# Altium PCB REINDEER_01.PcbDoc
Units mm, origin at the board's own origin, x right, y up, seen from the top; angles counter-clockwise.
Board outline 131.83 x 78.27 mm, 2 copper layers (Top Layer, Bottom Layer), stack 0.971 mm thick; 7 components, 4 nets, 64 pads, 4 vias.
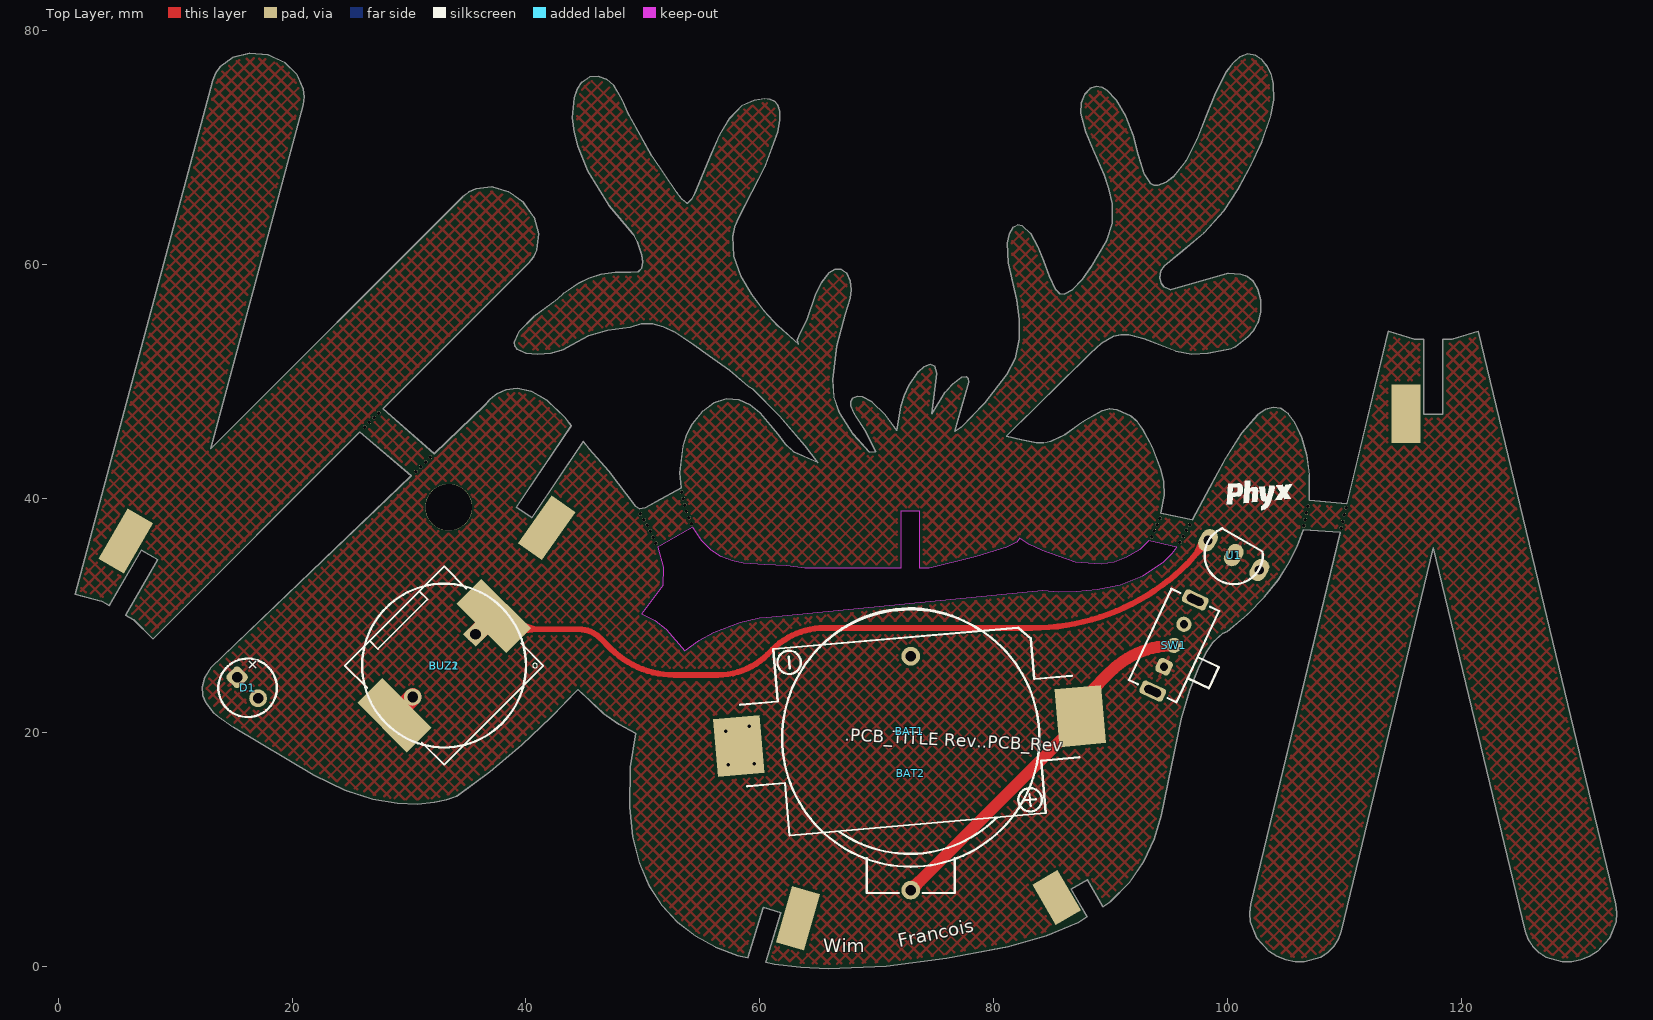
[diagram p0: Top Layer view]
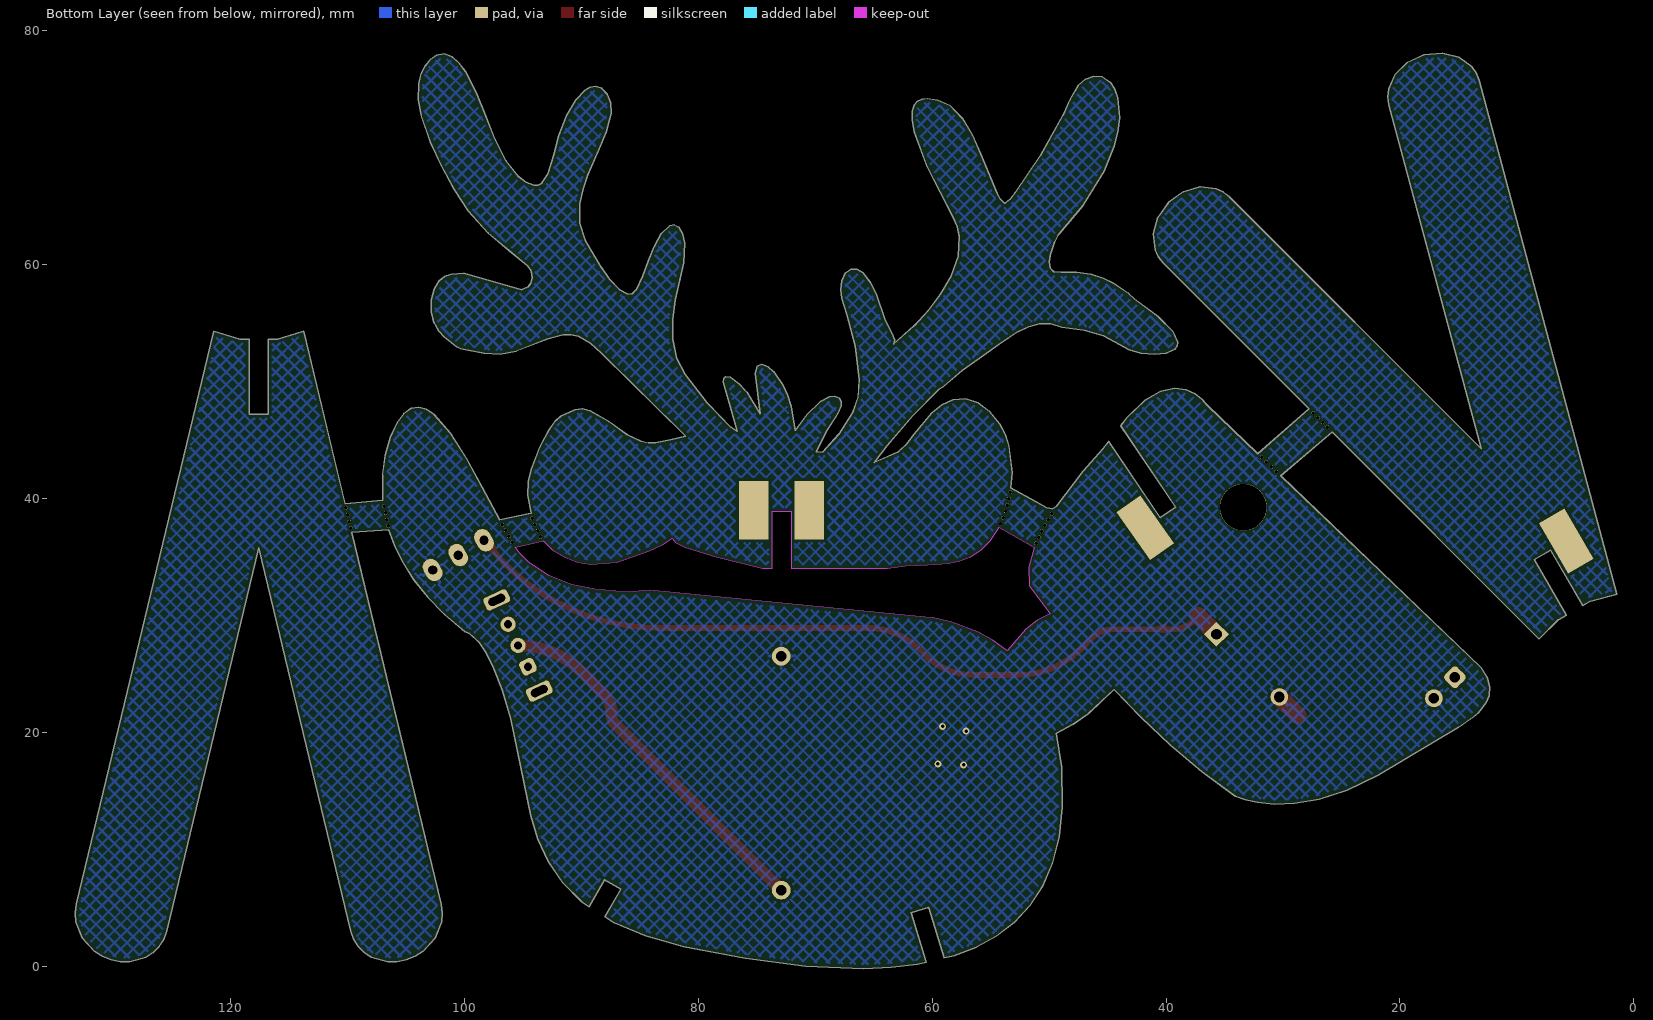
[diagram p1: Bottom Layer view, seen from below]
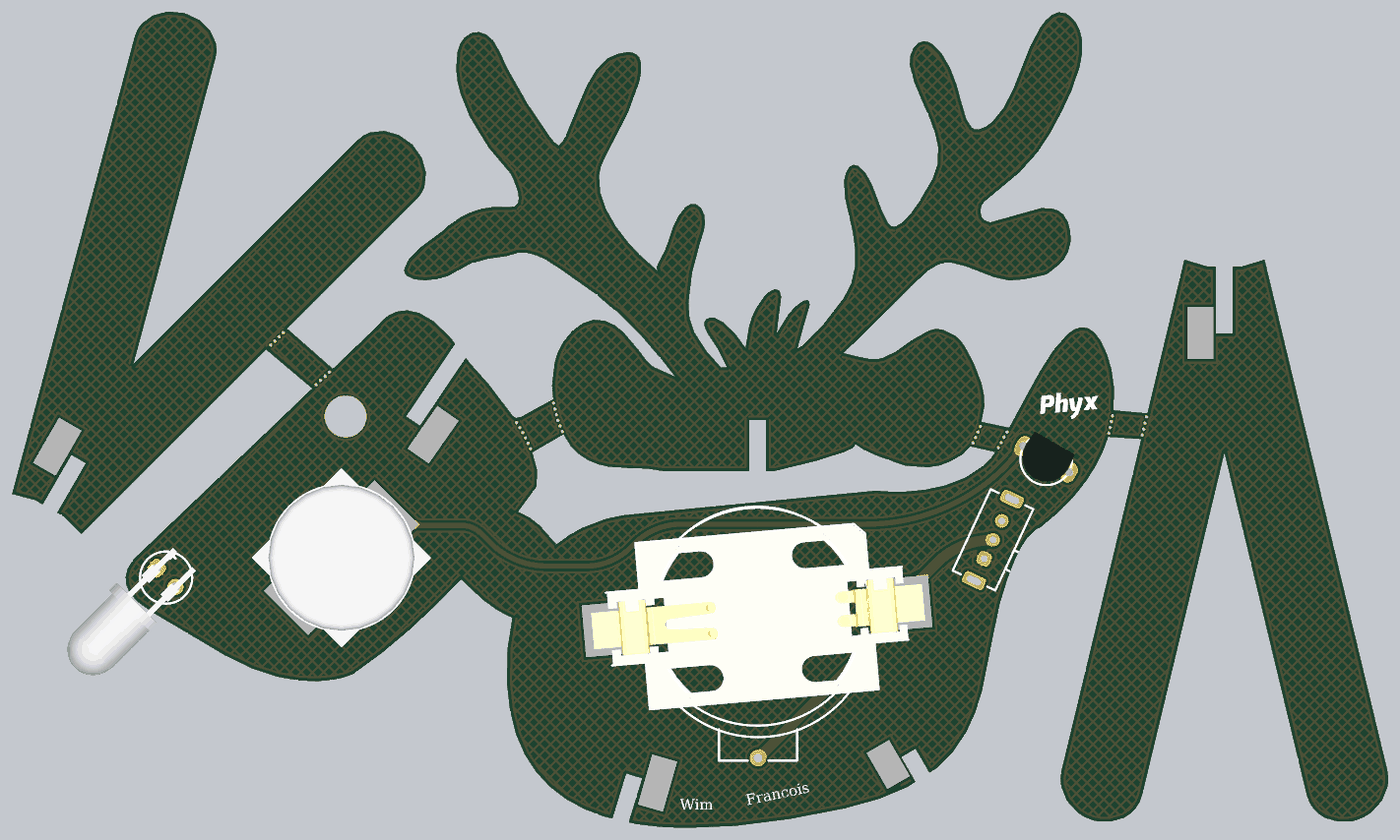
[diagram p2: 3D render of the assembled board from above, using the file's embedded part models]

## Layer stack, top to bottom
Top Solder: solder mask 0.0102, Solder Resist, Dk 3.5
Top Layer: signal copper 0.0356
Dielectric1: core 0.9, FR-4, Dk 4.8
Bottom Layer: signal copper 0.0356
Bottom Solder: solder mask 0.0102, Solder Resist, Dk 3.5

## Board outline
438 vertices, not listed, extent 1.45,-0.205 133.277,78.068
cut-out: 51.001,29.554 51.981,28.79 53.574,26.966 54.815,27.871 56.051,28.563 58.312,29.423 59.961,29.772 60.598,29.838 84.177,32.129 85.568,32.032 87.061,32.043 88.866,32.212 90.818,32.628 92.754,33.377 94.508,34.55 95.266,35.323 95.634,35.838 93.229,36.383 92.467,35.597 91.366,34.969 90.291,34.55 89.192,34.38 86.981,34.532 84.2,35.527 82.97,36.092 82.238,36.58 81.971,36.231 81.121,35.828 78.437,34.984 74.463,34.012 73.663,34.012 73.663,38.889 72.063,38.889 72.063,34.012 63.847,34.012 62.287,34.248 60.435,34.306 58.585,34.43 57.643,34.648 56.716,35.014 55.83,35.568 55.011,36.353 54.265,37.536 51.274,35.804 51.731,34.101 51.692,32.544 49.907,30.117

## Design rules (kind name [scope] priority, off if disabled: settings)
BoardOutlineClearance [NOT OnLayer('Top Overlay') AND NOT OnLayer('Bottom Overlay') AND NOT IsText AND NOT HasFootprint('MicroBIT_PCB') AND NOT IsKeepOut] p1: gap=0.5 ignorepadtopadclearanceinfootprint=FALSE except(0: Arc-SplitContinuation Track-SplitContinuation SMDPad-SplitContinuation THPad-SplitContinuation Via-SplitContinuation Fill-SplitContinuation Poly-SplitContinuation Region-SplitContinuation Text-SplitContinuation; 0.15: SMDPad-OutlineEdge THPad-OutlineEdge; 0.25: Poly-OutlineEdge Poly-CutoutEdge Region-OutlineEdge; 0.3: Arc-OutlineEdge Track-OutlineEdge; 0.4: Via-OutlineEdge)
Clearance [All] p1: gap=0.15 ignorepadtopadclearanceinfootprint=FALSE except(0.25: Arc-Poly Track-Poly SMDPad-Poly THPad-Poly Via-Poly Fill-Poly; 0.5: Poly-Poly)
ComponentClearance ComponentClearance_TP [HasFootprint('TP_2x3mm')] p1: gap=0 collisioncheckmode=3 verticalgap=0 showdistances=FALSE
ComponentClearance [All] p2: gap=0.25 collisioncheckmode=3 verticalgap=0.25 showdistances=FALSE
DiffPairsRouting [All] p1: maxlimit=0.254 minlimit=0.2 mostfreqgap=0.2 toplayer_minwidth=0.25 toplayer_maxwidth=0.5 toplayer_prefwidth=0.25 bottomlayer_minwidth=0.25 bottomlayer_maxwidth=0.5 bottomlayer_prefwidth=0.25 maxuncoupledlength=12.7
HoleSize [All] p1: absolutevalues=TRUE maxlimit=10 minlimit=0.025 maxpercent=80.000 minpercent=20.000
PolygonConnect PolygonConnect_VIA [IsVia] p1: connectstyle=Direct reliefconductorwidth=0.254 reliefentries=4 polygonreliefangle="90 Angle" airgapwidth=0.254
PolygonConnect [All] p2: connectstyle=Relief reliefconductorwidth=0.254 reliefentries=4 polygonreliefangle="90 Angle" airgapwidth=0.254
RoutingVias [All] p1: holewidth=0.3 width=0.7 viastyle="Through Hole" minholewidth=0.3 minwidth=0.2 maxholewidth=0.6 maxwidth=1.2
SilkToSolderMaskClearance SilkscreenOverComponentPads [IsPad] p1: minsilkscreentomaskgap=0.254 clearancetoexposedcopper=TRUE
SolderMaskExpansion [All] p1: expansion=0.05 istentingtop=FALSE
SupplyNets "Schematic Supply Nets_2" [InNet('VCC')] p1: voltage=0.000
SupplyNets "Schematic Supply Nets_1" [InNet('GND')] p2: voltage=0.000
SupplyNets "Schematic Supply Nets" [InNet('VBAT')] p3: voltage=0.000
Width [All] p1: maxlimit=5 minlimit=0.15 preferedwidth=0.25
26 further rules are at their usual default settings.

## Components (designator, comment, footprint, x,y, rotation, side; value= is the part's Value field where it differs from the comment)
BAT1 "CR2032 SMD Battery Holder" BAT_CR2032_KEY_1060 72.8,20.1 r5 top value=CR2032
BAT2 "CR2032 Battery Holder" BAT_CR2032_China 72.9,13.5 r270 top value=CR2032
BUZ1 "12x12x3mm Piezo Buzzer Transducer 81dB" CUI_CMT-1203-SMT 33,25.7 r225 top value=CMT-1203-SMT
BUZ2 "14x14x7mm Piezo Buzzer Transducer 80dB" CUI_CEP-1162 33,25.7 r225 top value=CMT-1203-SMT
D1 "5mm IR LED, 940nm, 100mA, 1.35V, 25Deg" LED_5MM_RD 16.2,23.8 r315 top value=TSAL6400
SW1 "mini Switch 1 pole double throw right angle" SK-12D07 95.405,27.418 r65 top value=SK-12D07
U1 "UM66T - Fur Elise" TO-92A_WIDE 100.508,35.146 r60 top value=UM66T-19L

## Footprints (in the part's own frame and the unit in brackets; to place one, negate y for a bottom-side part, rotate by r counter-clockwise, add the part's x,y. Pads: shape width x height; smd on the part's side, far side on the other; paste and mask are expansions set on the pad)
BAT_CR2032_China [mm]
  round 1.6 hole 0.9: 1(7,0) 2(-13,0)
  silkscreen extent -17,-11 7.25,11, body extent -17.5,-11.5 7.25,11.5, height 9.2
BAT_CR2032_KEY_1060 [mm]
  rect 4x5 smd: 1(14.655,0) 2(-14.655,0)
  silkscreen extent -14.25,-10.5 14.25,10.5, body extent -15.81,-8.06 16.02,7.94, height 5.7
CUI_CEP-1162 [mm] "14x14x7mm piezo buzzer 7.6mm pitch"
  rect 1.5x1.5 hole 0.9: 1(-3.8,0)
  round 1.5 hole 0.9: 2(3.8,0)
  silkscreen extent -7,-7 7,7, body extent -7,-6.99 7,6.99, height 7.1
CUI_CMT-1203-SMT [mm] "12x12x3mm piezo buzzer"
  rect 3x6 smd: 1(-6,0) 2(6,0)
  silkscreen extent -6,-6 6,6, body extent -6,-6 6,6, height 3.05
LED_5MM_RD [mil] "5mm LED RED"
  rrect50% 60x60 hole 35.43: 1(-50,0)
  round 60 hole 35.43: 2(50,0)
  silkscreen extent -98,-98 98,98, body extent -117,-485 96,98, height 118
SK-12D07 [mm] "SWITCH, SPDT, THT, RA"
  rrect50% 1.2x2.2 hole 0.7 slot 1.5 at 90 deg: 0(-4.3,0) 0(4.3,0)
  rrect50% 1.3x1.3 hole 0.7: 1(-2,0)
  round 1.3 hole 0.7: 2(0,0) 3(2,0)
  silkscreen extent -4.3,-4.25 4.3,2.25, body extent -4.3,-4.25 4.3,2.25, height 4.7
TO-92A_WIDE [mm] "TO, Flat Index; 3 In-Line, Axial Leads; Body Dia. 4.5mm; Leads 0.51 x 0.48 mm (max)"
  oval 2x1.4 hole 0.8: 1(0,-2.54) 2(0,0) 3(0,2.54)
  silkscreen extent -2.48,-2.48 1.5,2.48, body extent -2.17,-2.74 1.77,2.86, height 10.2

## Part data
BAT1: library part "BAT # 20mm Coin Cell Holder Keystone 1060", "=Description", Supplier Part Number 1=36-1060-ND, Supplier 1=Digi-key, Supplier 2=LCSC, Supplier Part Number 2=C70377
BAT2: library part "BAT 20mm Coin Cell Holder Generic", "=Description", Supplier Part Number 1=C5239862, Supplier 1=LCSC, Supplier 2=LCSC, Supplier Part Number 2=C70376
BUZ1: library part "BUZ # CUI CMT-1203-SMT", "Crystal Oscillator", Supplier Part Number 1=102-2197-1-ND, Supplier 1=Digi-key, Supplier 2=LCSC, Supplier 3=LCSC, Supplier Part Number 2=C409829, Supplier Part Number 3=C391037
BUZ2: library part "BUZ CUI CEP-1162", "Crystal Oscillator", Supplier Part Number 1=102-1134-ND, Supplier 1=Digi-key, Supplier 2=LCSC, Supplier Part Number 2=C360604
D1: library part "LED IR 5mm TSAL6400", "=Description", Supplier Part Number 1=3152868, Supplier 1=Farnell
SW1: library part "SW 1P2T micro RA SK-12D07", Supplier Part Number 1=C22383479, Supplier 1=LCSC, Supplier 2=LCSC, Supplier Part Number 2=C521448
U1: library part "SOUND UM66T-19L", "=Description", Supplier Part Number 1=C136140, Supplier 1=LCSC

## Free pads (board coordinates)
  rect 2.5x5 smd rot 150: 0(5.778,36.348)
  rect 2.5x5 smd far side rot 150: 0(5.778,36.348)
  rect 2.5x5 smd rot 145: 0(41.772,37.501)
  rect 2.5x5 smd far side rot 145: 0(41.772,37.501)
  rect 2.5x5 smd rot 164: 0(63.274,4.101)
  rect 2.5x5 smd far side: 0(70.5,39) 0(75.25,39)
  rect 2.5x4 smd rot 30: 0(85.368,5.876)
  rect 2.5x5 smd: 0(115.25,47.25)
  round 0.3 hole 0.3: 2(26.215,46.091) 2(26.614,46.49) 2(27.018,46.894) 2(27.415,47.29) 2(30.57,42.29) 2(30.995,42.697) 2(31.421,43.105) 2(31.837,43.503) 2(49.779,38.667) 2(50.08,38.174) 2(50.369,37.701) 2(50.627,37.19) 2(50.863,36.685) 2(51.11,36.156) 2(53.315,40.527) 2(53.448,39.972) 2(53.578,39.424) 2(53.722,38.873) 2(53.939,38.339) 2(54.154,37.811) 2(93.489,36.698) 2(93.735,37.243) 2(93.967,37.759) 2(94.207,38.291) 2(95.917,36.234) 2(96.191,36.74) 2(96.471,37.261) 2(96.736,37.752) 2(106.51,37.642) 2(106.62,38.187) 2(106.734,38.747) 2(106.85,39.321) 2(109.696,37.458) 2(109.829,38.014) 2(109.973,38.61) 2(110.113,39.195)
  round 4 hole 4: 2(33.394,39.241)

## Via types
v1: diameter 0.6, hole 0.3, Top Layer to Bottom Layer, tented bottom, 4 vias

## Nets (pads, with @x,y where several pads share a name; then routed paths per layer and width w, separated by ;. In a path a pad name is that pad's centre, name@x,y a point inside that pad or via, vN(x,y) a via of type N, cw(c..) or ccw(c..) an arc to the next point about the centre after c; other vN are vias at no path point)
GND: BAT1.2 BAT2.2 BUZ1.2 BUZ2.2 D1.2 U1.1 | length 2.2
  Top Layer w1.5: BUZ1.2 BUZ2.2
  other v1: 57.3,17.2 59.5,17.3 57.1,20.1 59.1,20.5
MELODY: BUZ1.1 BUZ2.1 U1.3 | length 68.3
  Top Layer w0.5: BUZ1.1 37.641,29.544 ccw(c39.437,31.34) 39.437,28.8 44.548,28.8 cw(c44.548,26.26) 46.344,28.056 47.254,27.146 47.256,27.143 ccw(c52.673,32.56) 52.673,24.9 52.674,24.9 56.426,24.9 56.427,24.9 ccw(c56.427,30.87) 60.65,26.65 61.072,27.072 cw(c65.53,22.618) 65.53,28.92 83.249,28.92 83.251,28.92 ccw(c83.253,47.771) 96.584,34.443 U1.3
  Top Layer w1.5: BUZ2.1 BUZ1.1
VBAT: BAT1.1 BAT2.1 SW1.2 | length 31.6
  Top Layer w1: BAT2.1 87.132,20.732 ccw(c86.487,21.377) BAT1.1 87.399,21.547 cw(c89.939,21.547) 88.143,23.343 89.965,25.165 cw(c95.405,19.725) SW1.2
VCC: D1.1 SW1.1 U1.2
pads on no net: SW1.0 SW1.3

## Polygon pours and split planes (outlines as drawn)
no net on Bottom Layer "NONET_L-01_P-001" (hatched 45Degree grid 0.75 track 0.2, pour order 3): -0.574,79 134.9,79 134.9,-1.2 0.5,-1.2 -2.3,1.6
GND on Bottom Layer "GND_BOT" (hatched 45Degree grid 0.75 track 0.2, remove dead copper, pour order 0): -0.574,79 134.9,79 134.9,-1.2 0.5,-1.2 -2.3,1.6
no net on Top Layer "NONET_L-01_P-001" (hatched 45Degree grid 0.75 track 0.2, pour order 2): -0.574,79 134.9,79 134.9,-1.2 0.5,-1.2 -2.3,1.6
VCC on Top Layer "VCC_TOP" (hatched 45Degree grid 0.75 track 0.2, remove dead copper, pour order 1): -0.574,79 134.9,79 134.9,-1.2 0.5,-1.2 -2.3,1.6

## Silkscreen, mask and mechanical layers (free items; w line width, h text height)
Top Overlay:
  drawing of 4 lines, arcs and shapes, not listed
  text "+" at 16.551,25.065 h1 r45
  text ".PCB_TITLE Rev..PCB_Rev" at 67.235,18.877 h1.8 r357.09
  text "Francois" at 72,1.25 h2 r11.75
  text "Wim" at 65.4,0.8 h2
Route Tool Path:
  drawing of 437 lines, arcs and shapes, not listed
Comments:
  lines w0.1: 3.49,37.669 12.15,32.668 ; 8.101,27.977 40.235,60.111 ; 13.073,25.541 36.485,47.952 ; 53.167,42.2 53.315,40.527 ; 56.254,6.247 65.817,3.323 ; 82.968,4.491 91.63,9.49 ; 93.45,36.611 94.206,38.291 ; 95.917,36.234 98.456,40.938 ; 101.973,5.304 113.735,54.277 ; 106.439,37.292 106.955,39.837 ; 31.445,39.233 31.597,38.481 32.011,37.867 32.625,37.453 33.377,37.302 34.129,37.453 34.743,37.867 35.157,38.481 35.308,39.233 35.157,39.985 34.743,40.599 34.129,41.013 33.377,41.164 32.625,41.013 32.011,40.599 31.597,39.985 31.445,39.233
  lines w0.5: 49.391,39.302 50.451,37.567 51.274,35.804 ; 53.315,40.527 53.691,38.95 54.265,37.536 ; 56.351,22.403 56.961,15.43 61.445,15.822 61.88,10.841 84.793,12.845 84.357,17.826 88.839,18.218 88.23,25.192 83.747,24.799 83.311,29.781 60.399,27.776 60.834,22.795 56.351,22.403
Fabrication:
  lines w0.1: 49.907,30.117 51.692,32.544 51.731,34.101 51.274,35.804 54.265,37.536 55.011,36.353 55.83,35.568 56.716,35.014 57.643,34.648 58.585,34.43 60.435,34.306 62.287,34.248 63.847,34.012 72.063,34.012 72.063,38.889 73.663,38.889 73.663,34.012 74.463,34.012 78.437,34.984 81.121,35.828 81.971,36.231 82.238,36.58 82.97,36.092 84.2,35.527 86.981,34.532 89.192,34.38 90.291,34.55 91.366,34.969 92.467,35.597 93.229,36.383 95.634,35.838 95.266,35.323 94.508,34.55 92.754,33.377 90.818,32.628 88.866,32.212 87.061,32.043 85.568,32.032 84.177,32.129 60.598,29.838 59.961,29.772 58.312,29.423 56.051,28.563 54.815,27.871 53.574,26.966 51.981,28.79 51.001,29.554 49.907,30.117
  text "1.6mm Thickness" at 1,-13.5 h1.5
  text "Red Soldermask" at 1,-16 h1.5
Frame:
  drawing of 15 lines, arcs and shapes, not listed
  text "Document" at 232.402,-31.311 h2
  text ".PCB_TITLE" at 233.902,-36.811 h3.2
  text "Layer Name" at 232.402,-41.311 h2
  text "<NOT USED>" at 236.902,-46.311 h3.5
  text "Date" at 232.402,-51.311 h2
  text "Rev" at 272.402,-51.311 h2
  text ".Print_Date" at 235.402,-56.811 h3.5
  text ".PCB_REV" at 276.902,-56.811 h4
  text "Desginer" at 182.402,-61.311 h2
  text "Document" at 232.402,-61.311 h2
  text ".Pcb_File_Name_No_Path" at 233.902,-66.311 h1.5
  text ".PCB_ENGINEER" at 186.902,-66.811 h4
Drill Drawing:
  circle w0.15: c9.542,90.129 r0.444
  lines w0.15: 8.295,89.084 146.11,89.084 ; 8.295,101.084 146.11,101.084 ; 15.693,87.084 15.693,103.084 ; 22.925,87.084 22.925,103.084 ; 38.287,87.084 38.287,103.084 ; 45.085,87.084 45.085,103.084 ; 54.923,87.084 54.923,103.084 ; 74.95,87.084 74.95,103.084 ; 82.868,87.084 82.868,103.084 ; 97.43,87.084 97.43,103.084 ; 112.793,87.084 112.793,103.084 ; 127.355,87.084 127.355,103.084 ; 8.295,87.084 146.11,87.084 146.11,103.084 8.295,103.084 8.295,87.084 ; 9.097,91.906 9.32,91.906 9.542,91.684 9.764,91.906 9.986,91.906 9.764,92.129 9.986,92.351 9.764,92.351 9.542,92.573 9.32,92.351 9.097,92.351 9.32,92.129 9.097,91.906 ; 9.097,93.684 9.986,93.684 9.986,94.573 9.097,94.573 9.097,93.684 ; 9.097,96.573 9.986,96.573 9.542,95.684 9.097,96.573 ; 9.097,97.906 9.32,97.906 9.32,97.684 9.764,97.684 9.764,97.906 9.986,97.906 9.986,98.351 9.764,98.351 9.764,98.573 9.32,98.573 9.32,98.351 9.097,98.351 9.097,97.906 ; 9.097,99.684 9.542,99.906 9.986,99.684 9.764,100.129 9.986,100.573 9.542,100.351 9.097,100.573 9.32,100.129 9.097,99.684
  text "Symbol" at 9.495,101.684 h0.96
  text "Count" at 16.293,101.684 h0.96
  text "Hole Size" at 23.525,101.684 h0.96
  text "Plated" at 38.887,101.684 h0.96
  text "Hole Type" at 45.685,101.684 h0.96
  text "Drill Layer Pair" at 55.523,101.684 h0.96
  text "Via/Pad" at 75.55,101.684 h0.96
  text "Pad Shape" at 83.468,101.684 h0.96
  text "Template" at 98.03,101.684 h0.96
  text "Hole Length" at 113.393,101.684 h0.96
  text "Routed Path Length" at 127.955,101.684 h0.96
  text "1" at 16.293,99.684 h0.8
  text "4.000mm (157.48mil)" at 23.525,99.684 h0.8
  text "PTH" at 38.887,99.684 h0.8
  text "Round" at 45.685,99.684 h0.8
  text "Top Layer - Bottom Layer" at 55.523,99.684 h0.8
  text "Pad" at 75.55,99.684 h0.8
  text "Rounded" at 83.468,99.684 h0.8
  text "c400h400" at 98.03,99.684 h0.8
  text "-" at 113.393,99.684 h0.8
  text "-" at 127.955,99.684 h0.8
  text "2" at 16.293,97.684 h0.8
  text "0.700mm (27.56mil)" at 23.525,97.684 h0.8
  text "PTH" at 38.887,97.684 h0.8
  text "Slot" at 45.685,97.684 h0.8
  text "Top Layer - Bottom Layer" at 55.523,97.684 h0.8
  text "Pad" at 75.55,97.684 h0.8
  text "Rounded Rectangle" at 83.468,97.684 h0.8
  text "r220_120h70_150r30" at 98.03,97.684 h0.8
  text "1.500mm (59.06mil)" at 113.393,97.684 h0.8
  text "0.800mm (31.50mil)" at 127.955,97.684 h0.8
  text "3" at 16.293,95.684 h0.8
  text "0.700mm (27.56mil)" at 23.525,95.684 h0.8
  text "PTH" at 38.887,95.684 h0.8
  text "Round" at 45.685,95.684 h0.8
  text "Top Layer - Bottom Layer" at 55.523,95.684 h0.8
  text "Pad" at 75.55,95.684 h0.8
  text "(Mixed)" at 83.468,95.684 h0.8
  text "(Mixed)" at 98.03,95.684 h0.8
  text "-" at 113.393,95.684 h0.8
  text "-" at 127.955,95.684 h0.8
  text "3" at 16.293,93.684 h0.8
  text "0.800mm (31.50mil)" at 23.525,93.684 h0.8
  text "PTH" at 38.887,93.684 h0.8
  text "Round" at 45.685,93.684 h0.8
  text "Top Layer - Bottom Layer" at 55.523,93.684 h0.8
  text "Pad" at 75.55,93.684 h0.8
  text "Rounded" at 83.468,93.684 h0.8
  text "r200_140h80r70" at 98.03,93.684 h0.8
  text "-" at 113.393,93.684 h0.8
  text "-" at 127.955,93.684 h0.8
  text "6" at 16.293,91.684 h0.8
  text "0.900mm (35.43mil)" at 23.525,91.684 h0.8
  text "PTH" at 38.887,91.684 h0.8
  text "Round" at 45.685,91.684 h0.8
  text "Top Layer - Bottom Layer" at 55.523,91.684 h0.8
  text "Pad" at 75.55,91.684 h0.8
  text "(Mixed)" at 83.468,91.684 h0.8
  text "(Mixed)" at 98.03,91.684 h0.8
  text "-" at 113.393,91.684 h0.8
  text "-" at 127.955,91.684 h0.8
  text "40" at 16.293,89.684 h0.8
  text "0.300mm (11.81mil)" at 23.525,89.684 h0.8
  text "PTH" at 38.887,89.684 h0.8
  text "Round" at 45.685,89.684 h0.8
  text "Top Layer - Bottom Layer" at 55.523,89.684 h0.8
  text "(Mixed)" at 75.55,89.684 h0.8
  text "Rounded" at 83.468,89.684 h0.8
  text "(Mixed)" at 98.03,89.684 h0.8
  text "-" at 113.393,89.684 h0.8
  text "-" at 127.955,89.684 h0.8
  text "55 Total" at 16.293,87.684 h0.8
  text "Slot definitions :" at 9.495,85.718 h0.8
  text "Routed Path Length" at 23.311,85.718 h0.8
  text "= Calculated from tool start centre position to tool end centre position." at 38.06,85.718 h0.8
  text "Hole Length" at 23.311,84.352 h0.8
  text "= Routed Path Length + Tool Size = Slot length as defined in the PCB layout" at 32.595,84.352 h0.8

## Dimensions
1.45,31.817 to 133.277,4.541 on Fabrication
16.371,78.068 to 65.839,-0.205 on Fabrication

## Text inside footprints (layer, text, board x,y; h text height)
BAT1: Comments "+UP" at 61.16,18.329 h2 r5; Comments "Adhesive" at 70.462,18.139 h0.8 r38.11